# EAGLE board Front_right_lamp (EAGLE 7.3.0)
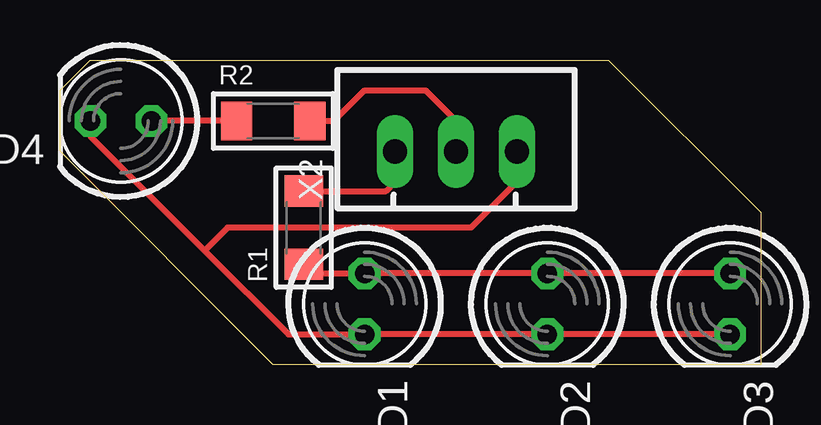
[diagram p0: board, top side]

Size 29.21 x 12.7 mm. Coordinates in mm from the lower left corner, seen from the top.
Outline: 29.21,6.35 29.21,0 8.89,0 0,8.89 0,11.43 1.27,12.7 22.86,12.7 29.21,6.35
Copper layers (1*16): Top 0.035mm / dielectric 1.5mm / Bottom 0.035mm
Design rules "default": minimum track width 10mil, minimum drill 24mil, track to track 8mil, track to pad 8mil, pad to pad 8mil, via to via 8mil, smd to smd 8mil, copper to edge 40mil, drill to drill 8mil, minimum pad ring 10mil, minimum via ring 8mil, stop-mask expansion 4mil, vias tented up to drill 0mil, thermal gap 10mil

## Footprints (pad centres in the part's own frame; a part is rotated, then mirrored left to right if it is on the bottom)
LED5MM = drill 0.813 octagon: A -1.27,0; K 1.27,0
R1206 = smd 1.3 x 1.6: 1 -1.524,0; 2 1.524,0
JST-XH-03-PACKAGE-LONG-PAD = drill 1.016 long: 1 -2.54,0; 2 0,0; 3 2.54,0

## Placement (x,y rotation side)
LED1  White  [LED5MM]  12.7,2.54 270 top
LED2  White  [LED5MM]  20.32,2.54 270 top
LED3  White  [LED5MM]  27.94,2.54 270 top
LED4  Yellow  [LED5MM]  2.54,10.16 180 top
R1  1K5  [R1206]  10.16,5.71 90 top
R2  680  [R1206]  8.89,10.16 0 top
X2  JST-XH-03-PIN-LONG-PAD  [JST-XH-03-PACKAGE-LONG-PAD]  16.51,8.89 0 top

## Library data of the parts
LED1-LED3 = led; COLOR: White; CURRENT_EMPIRICAL: 0.14 mA; MANUFACTURER: LUCKYLIGHT; MANUFACTURER_PART_NUMBER: LL-504WC2V-W2-3PD; SUPPLIER: TME; SUPPLIER_PART_NUMBER: LL-504WC2V-W2-3PD; SUPPLIER_URL: https://www.tme.eu/pl/details/ll-504wc2v-w2-3pd/diody-led-tht-okragle/luckylight/; VOLTAGE_EMPIRICAL: 2.58 V
LED4 = led; COLOR: Yellow; CURRENT_EMPIRICAL: 1.42 mA; MANUFACTURER: LUCKYLIGHT; MANUFACTURER_PART_NUMBER: LL-503YD2E-1B; SUPPLIER: TME; SUPPLIER_PART_NUMBER: LL-503YD2E-1B; SUPPLIER_URL: https://www.tme.eu/pl/details/ll-503yd2e-1b/diody-led-tht-okragle/luckylight/; VOLTAGE_EMPIRICAL: 1.88 V
R1 = rc-master-smd; MANUFACTURER: ROYAL OHM; MANUFACTURER_PART_NUMBER: 1206S4J0152T5E; RESISTANCE: 1.5 kOhm; SUPPLIER: TME; SUPPLIER_PART_NUMBER: 1206S4J0152T5E; SUPPLIER_URL: https://www.tme.eu/pl/details/1206s4j0152t5e/rezystory-smd/royal-ohm/
R2 = rc-master-smd; MANUFACTURER: ROYAL OHM; MANUFACTURER_PART_NUMBER: 1206S4J0681T5E; RESISTANCE: 680 Ohm; SUPPLIER: TME; SUPPLIER_PART_NUMBER: 1206S4J0681T5E; SUPPLIER_URL: https://www.tme.eu/pl/details/1206s4j0681t5e/rezystory-smd/royal-ohm/
X2 = Rembrandt Electronics - JST XH Connectors v1-0

## Nets
API_START_ENGINE: LED1.A LED2.A LED3.A R1.1
API_TURN_RIGHT: R2.2 X2.2
GND: LED1.K LED2.K LED3.K LED4.K X2.3
N$1: LED4.A R2.1
N$2: R1.2 X2.1

## Tracks (layer width: path | path; a pad name or v marks a point on that pad's centre or on a via)
API_START_ENGINE
  Top 0.254: LED3.A LED2.A LED1.A 10.54,3.81 R1.1
API_TURN_RIGHT
  Top 0.254: X2.2 16.51,10.16 15.24,11.43 12.7,11.43 11.43,10.16 R2.2
GND
  Top 0.254: 6.03,4.76 1.27,9.53 LED4.K | 6.03,4.76 9.53,1.27 LED1.K LED2.K LED3.K | X2.3 19.05,7.62 17.14,5.71 6.99,5.71 6.03,4.76
N$1
  Top 0.254: R2.1 LED4.A
N$2
  Top 0.254: X2.1 13.97,7.62 13.59,7.24 R1.2